# Altium PCB test_btb.PcbDoc
Units mm, origin at the board's own origin, x right, y up, seen from the top; angles counter-clockwise.
Board outline 30 x 29.97 mm, 2 copper layers (Top Layer, Bottom Layer); 8 components, 144 nets, 288 pads, 72 vias.
Unrouted connection lines stored in the file: 73.
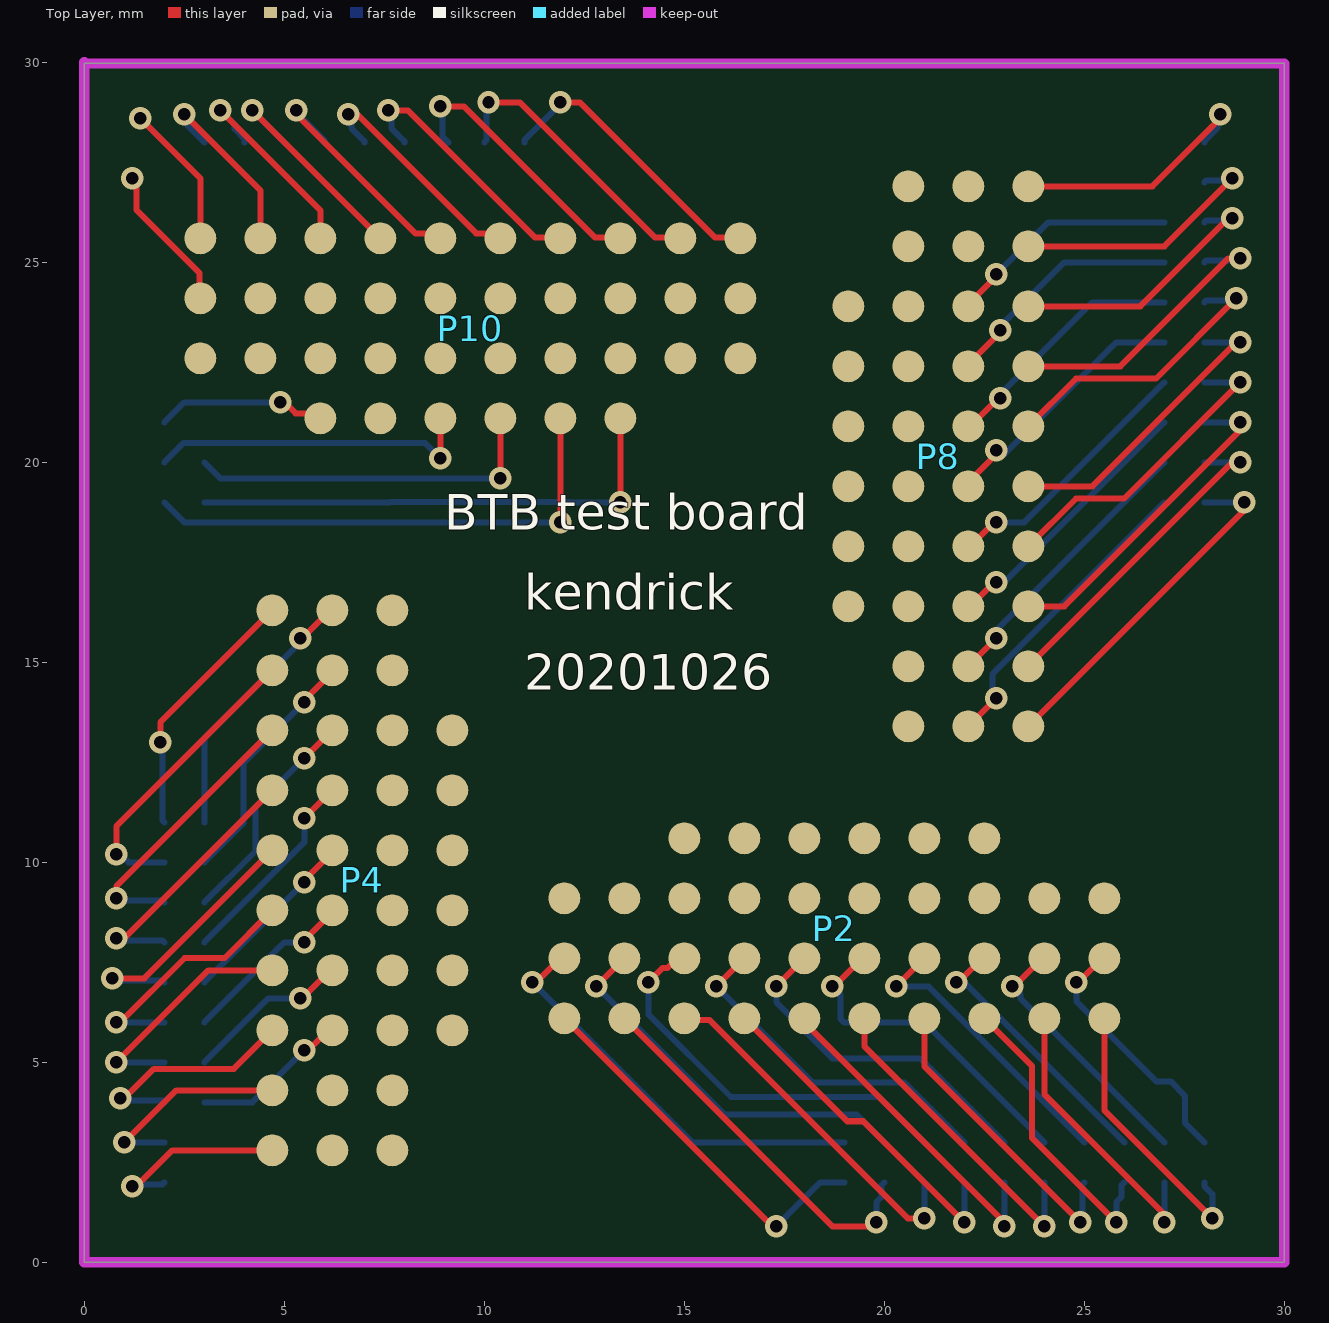
[diagram p0: Top Layer view]
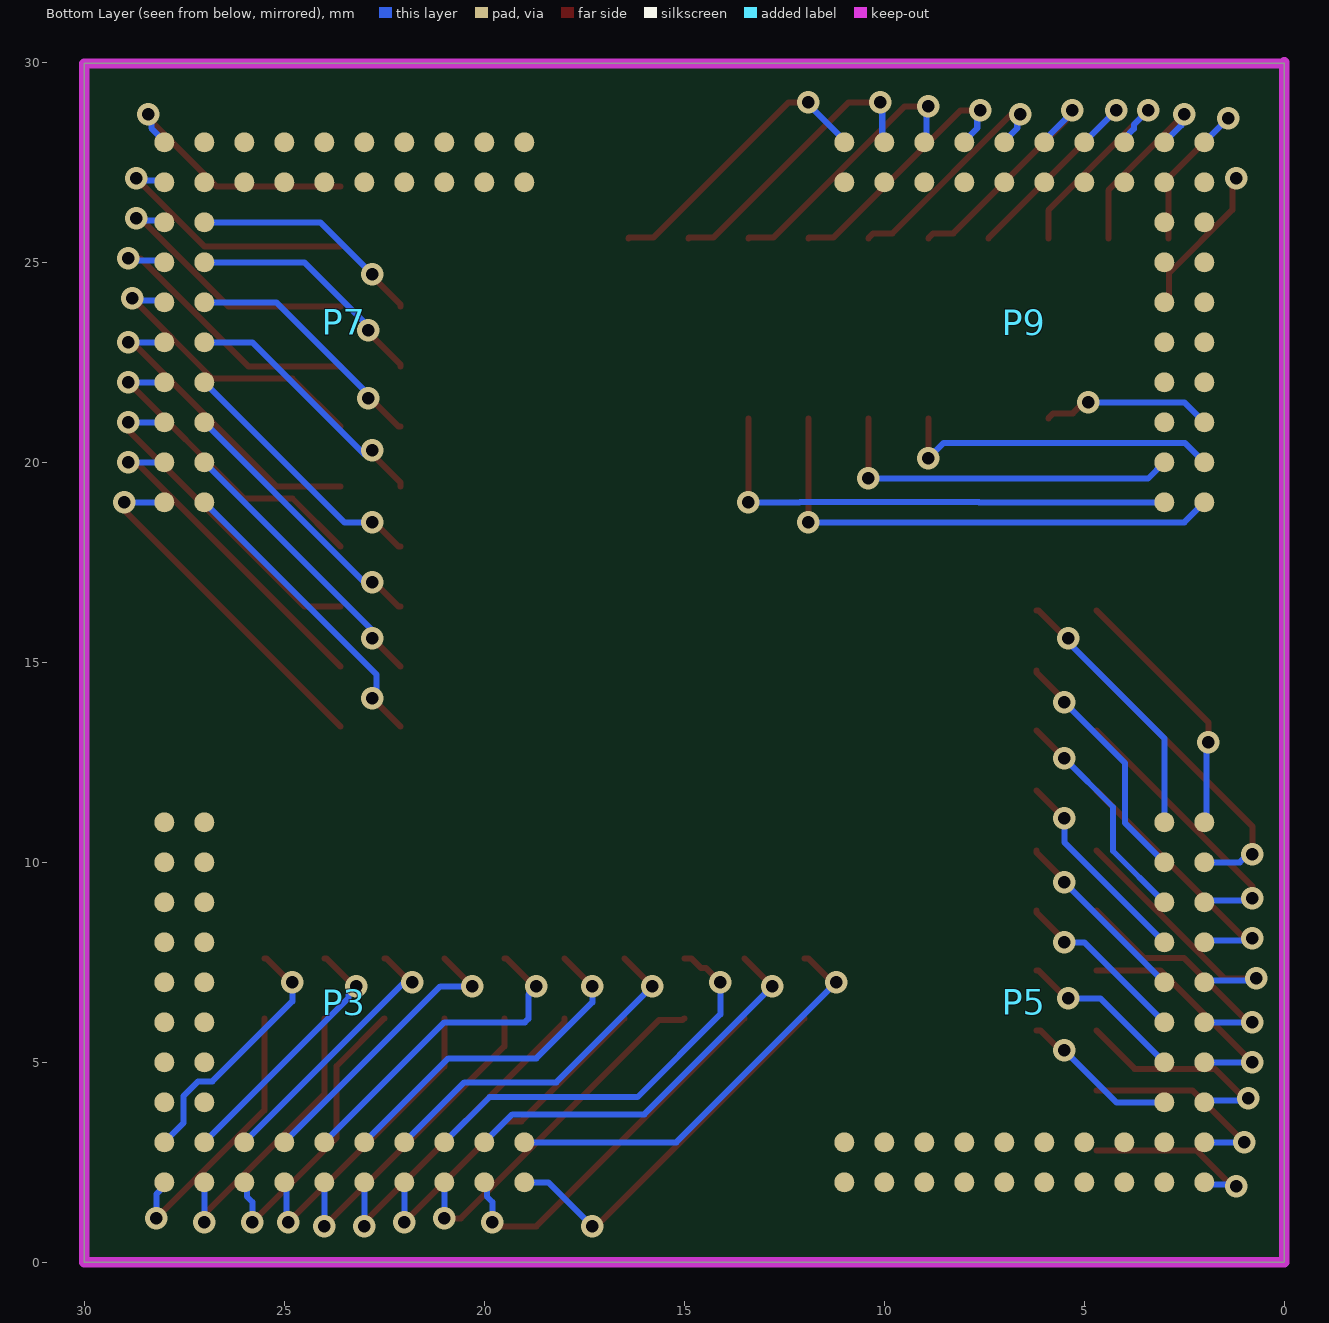
[diagram p1: Bottom Layer view, seen from below]

## Layer stack, top to bottom
Top Solder: solder mask 0.0102, Solder Resist, Dk 3.5
Top Layer: signal copper 0.0356
Dielectric 1: dielectric 0.32, FR-4, Dk 4.8
Bottom Layer: signal copper 0.0356
Bottom Solder: solder mask 0.0102, Solder Resist, Dk 3.5

## Board outline
0,0 0,29.972 30,29.972 30,0

## Design rules (kind name [scope] priority, off if disabled: settings)
Clearance POLY-VIA [IsVia vs InPoly] p1: gap=0.152 ignorepadtopadclearanceinfootprint=FALSE except(0: Arc-Hole Track-Hole SMDPad-Hole THPad-Hole Via-Hole Fill-Hole Poly-Hole Region-Hole Text-Hole)
Clearance POLY [InPoly] p2: gap=0.254 ignorepadtopadclearanceinfootprint=FALSE except(0: Arc-Hole Track-Hole SMDPad-Hole THPad-Hole Via-Hole Fill-Hole Poly-Hole Region-Hole Text-Hole)
Clearance [All] p3: gap=0.152 ignorepadtopadclearanceinfootprint=FALSE except(0: Arc-Hole Track-Hole SMDPad-Hole THPad-Hole Via-Hole Fill-Hole Poly-Hole Region-Hole Text-Hole)
ComponentClearance [All] p1 off: gap=0.254 collisioncheckmode=3 verticalgap=2540 showdistances=FALSE
HoleToHoleClearance [All] p1: gap=0.203 allowstackedmicrovias=TRUE
PolygonConnect [All] p1: connectstyle=Relief reliefconductorwidth=0.254 reliefentries=4 polygonreliefangle="90 Angle" airgapwidth=0.254
RoutingVias [All] p1: holewidth=0.33 width=0.66 viastyle="Through Hole" minholewidth=0.305 minwidth=0.559 maxholewidth=0.711 maxwidth=1.27
SolderMaskExpansion [All] p1: expansion=0.102 istentingtop=FALSE
Width Width_6 [InNetClass('SDRAM_ADDRESS')] p1: maxlimit=0.254 minlimit=0.152 preferedwidth=0.254 bottomlayer_prefwidth=0.203 minimp=50.000000 maximp=50.000000 favimp=50.000000
Width Width_5 [InNetClass('LCD')] p2: maxlimit=0.254 minlimit=0.152 preferedwidth=0.203 minimp=50.000000 maximp=50.000000 favimp=50.000000
Width Width_4 [InNetClass('FLASH_ADDRESS')] p3: maxlimit=0.254 minlimit=0.152 preferedwidth=0.203 minimp=50.000000 maximp=50.000000 favimp=50.000000
Width Width_3 [InNetClass('SDRAM_DATA')] p4: maxlimit=0.254 minlimit=0.152 preferedwidth=0.152 minimp=50.000000 maximp=50.000000 favimp=50.000000
Width Width_2 [InNet('VCC_3.3V')] p5: maxlimit=0.762 minlimit=0.152 preferedwidth=0.254 minimp=50.000000 maximp=50.000000 favimp=50.000000
Width Width_1 [InNet('VCC_5V')] p6: maxlimit=0.762 minlimit=0.203 preferedwidth=0.254 minimp=50.000000 maximp=50.000000 favimp=50.000000
Width [All] p7: maxlimit=0.762 minlimit=0.152 preferedwidth=0.254 minimp=50.000000 maximp=50.000000 favimp=50.000000
28 further rules are at their usual default settings.

## Components (designator, comment, footprint, x,y, rotation, side; value= is the part's Value field where it differs from the comment)
P2 "TEST_BTB_T" TEST_BTB_T 25.5,6.1 r180 top locked
P3 "TEST_BTB_B" TEST_BTB_B 28,2 r180 top locked
P4 "TEST_BTB_T" TEST_BTB_T 4.7,2.8 r90 top locked
P5 "TEST_BTB_B" TEST_BTB_B 2,2 r90 top locked
P7 "TEST_BTB_B" TEST_BTB_B 28,28 r270 top locked
P8 "TEST_BTB_T" TEST_BTB_T 23.6,26.9 r270 top locked
P9 "TEST_BTB_B" TEST_BTB_B 2,28 r0 top locked
P10 "TEST_BTB_T" TEST_BTB_T 2.9,25.6 r0 top locked

## Footprints (in the part's own frame and the unit in brackets; to place one, negate y for a bottom-side part, rotate by r counter-clockwise, add the part's x,y. Pads: shape width x height; smd on the part's side, far side on the other; paste and mask are expansions set on the pad)
TEST_BTB_B [mm] "测试板级之间的焊盘连接"
  round 0.5 smd far side: 1(0,0) 2(1,0) 3(2,0) 4(3,0) 5(4,0) 6(5,0) 7(6,0) 8(7,0) 9(8,0) 10(9,0) 11(0,-1) 12(1,-1) 13(2,-1) 14(3,-1) 15(4,-1) 16(5,-1) 17(6,-1) 18(7,-1) 19(8,-1) 20(9,-1) 21(0,-2) 22(1,-2) 23(0,-3) 24(1,-3) 25(0,-4) 26(1,-4) 27(0,-5) 28(1,-5) 29(0,-6) 30(1,-6) 31(0,-7) 32(1,-7) 33(0,-8) 34(1,-8) 35(0,-9) 36(1,-9)
TEST_BTB_T [mm] "测试板级之间的焊盘连接"
  round 0.8 smd: 1(0,0) 2(1.5,0) 3(3,0) 4(4.5,0) 5(6,0) 6(7.5,0) 7(9,0) 8(10.5,0) 9(12,0) 10(13.5,0) 11(0,-1.5) 12(1.5,-1.5) 13(3,-1.5) 14(4.5,-1.5) 15(6,-1.5) 16(7.5,-1.5) 17(9,-1.5) 18(10.5,-1.5) 19(12,-1.5) 20(13.5,-1.5) 21(0,-3) 22(1.5,-3) 23(3,-3) 24(4.5,-3) 25(6,-3) 26(7.5,-3) 27(9,-3) 28(10.5,-3) 29(12,-3) 30(13.5,-3) 31(3,-4.5) 32(4.5,-4.5) 33(6,-4.5) 34(7.5,-4.5) 35(9,-4.5) 36(10.5,-4.5)

## Via types
v1: diameter 0.559/0.559 (per signal layer), hole 0.305, Top Layer to Bottom Layer, tented both sides, 72 vias

## Nets (pads, with @x,y where several pads share a name; then routed paths per layer and width w, separated by ;. In a path a pad name is that pad's centre, name@x,y a point inside that pad or via, vN(x,y) a via of type N, cw(c..) or ccw(c..) an arc to the next point about the centre after c; other vN are vias at no path point)
NetP2_1: P2.1 P3.1 | length 7.1
  Top Layer w0.152: P2.1 25.5,3.8 v1(28.2,1.1)
  Bottom Layer w0.152: P3.1 28,1.906 28.2,1.706 v1(28.2,1.1)
NetP2_2: P2.2 P3.2 | length 7.3
  Top Layer w0.152: P2.2 24,4.2 27,1.2 v1(27,1)
  Bottom Layer w0.152: v1(27,1) P3.2
NetP2_3: P2.3 P3.3 | length 7.5
  Top Layer w0.152: P2.3 23.695,4.905 23.695,3.105 v1(25.8,1)
  Bottom Layer w0.152: v1(25.8,1) 25.8,1.508 25.933,1.641 25.933,1.933 P3.3
NetP2_4: P2.4 P3.4 | length 7.8
  Top Layer w0.152: P2.4 21,4.9 v1(24.9,1)
  Bottom Layer w0.152: v1(24.9,1) 24.95,1.05 24.95,1.95 P3.4
NetP2_5: P2.5 P3.5 | length 8.2
  Top Layer w0.152: P2.5 19.5,5.4 v1(24,0.9)
  Bottom Layer w0.152: v1(24,0.9) P3.5
NetP2_6: P2.6 P3.6 | length 8.4
  Top Layer w0.152: P2.6 18,6 23,1 v1(23,0.9)
  Bottom Layer w0.152: v1(23,0.9) P3.6
NetP2_7: P2.7 P3.7 | length 8.6
  Top Layer w0.152: P2.7 19.073,3.527 19.473,3.527 v1(22,1)
  Bottom Layer w0.152: v1(22,1) P3.7
NetP2_8: P2.8 P3.8 | length 9
  Top Layer w0.152: P2.8 15.041,6.059 15.629,6.059 20.588,1.1 v1(21,1.1)
  Bottom Layer w0.152: v1(21,1.1) P3.8
NetP2_9: P2.9 P3.9 | length 9.6
  Top Layer w0.152: P2.9 18.7,0.9 19.711,0.9 19.8,0.989 v1(19.8,1)
  Bottom Layer w0.152: v1(19.8,1) 19.8,1.508 19.934,1.642 19.934,1.933 P3.9
NetP2_10: P2.10 P3.10 | length 9.6
  Top Layer w0.152: P2.10 17.2,0.9 v1(17.3,0.9)
  Bottom Layer w0.152: v1(17.3,0.9) 18.4,2 P3.10
NetP2_11: P2.11 P3.11 | length 6.5
  Top Layer w0.152: v1(24.8,7) 24.85,7 25.45,7.6 P2.11
  Bottom Layer w0.152: v1(24.8,7) 24.8,6.523 26.802,4.521 27.155,4.521 27.521,4.155 27.521,3.479 P3.11
NetP2_12: P2.12 P3.12 | length 6.6
  Top Layer w0.152: v1(23.2,6.9) 23.25,6.9 23.95,7.6 P2.12
  Bottom Layer w0.152: v1(23.2,6.9) 23.4,6.7 23.4,6.6 P3.12
NetP2_13: P2.13 P3.13 | length 6.8
  Top Layer w0.152: v1(21.8,7) 21.85,7 22.45,7.6 P2.13
  Bottom Layer w0.152: v1(21.8,7) 22,7 P3.13
NetP2_14: P2.14 P3.14 | length 7.3
  Top Layer w0.152: v1(20.3,6.9) P2.14
  Bottom Layer w0.152: v1(20.3,6.9) 21.1,6.9 P3.14
NetP2_15: P2.15 P3.15 | length 8.4
  Top Layer w0.152: v1(18.7,6.9) 18.75,6.9 19.45,7.6 P2.15
  Bottom Layer w0.152: v1(18.7,6.9) 18.9,6.7 18.9,6.089 18.989,6 21,6 P3.15
NetP2_16: P2.16 P3.16 | length 8.5
  Top Layer w0.152: v1(17.3,6.9) P2.16
  Bottom Layer w0.152: v1(17.3,6.9) 17.3,6.5 18.7,5.1 20.9,5.1 P3.16
NetP2_17: P2.17 P3.17 | length 8.8
  Top Layer w0.152: v1(15.8,6.9) P2.17
  Bottom Layer w0.152: v1(15.8,6.9) 15.9,6.8 18.2,4.5 20.5,4.5 P3.17
NetP2_18: P2.18 P3.18 | length 10.2
  Top Layer w0.152: v1(14.1,7) 14.459,7.359 14.584,7.359 14.825,7.6 P2.18
  Bottom Layer w0.152: v1(14.1,7) 14.1,6.2 16.167,4.133 19.867,4.133 P3.18
NetP2_19: P2.19 P3.19 | length 9.8
  Top Layer w0.152: v1(12.8,6.9) P2.19
  Bottom Layer w0.152: v1(12.8,6.9) 16,3.7 19.3,3.7 P3.19
NetP2_20: P2.20 P3.20 | length 10.5
  Top Layer w0.152: v1(11.2,7) 11.3,7 11.9,7.6 P2.20
  Bottom Layer w0.152: v1(11.2,7) 15.2,3 P3.20
NetP2_21: P2.21 P3.21
NetP2_22: P2.22 P3.22
NetP2_23: P2.23 P3.23
NetP2_24: P2.24 P3.24
NetP2_25: P2.25 P3.25
NetP2_26: P2.26 P3.26
NetP2_27: P2.27 P3.27
NetP2_28: P2.28 P3.28
NetP2_29: P2.29 P3.29
NetP2_30: P2.30 P3.30
NetP2_31: P2.31 P3.31
NetP2_32: P2.32 P3.32
NetP2_33: P2.33 P3.33
NetP2_34: P2.34 P3.34
NetP2_35: P2.35 P3.35
NetP2_36: P2.36 P3.36
NetP4_1: P4.1 P5.1 | length 4.7
  Top Layer w0.152: v1(1.2,1.9) 1.3,1.9 2.2,2.8 P4.1
  Bottom Layer w0.152: v1(1.2,1.9) 1.25,1.95 1.95,1.95 P5.1
NetP4_2: P4.2 P5.2 | length 5.2
  Top Layer w0.152: v1(1,3) 2.3,4.3 P4.2
  Bottom Layer w0.152: v1(1,3) P5.2
NetP4_3: P4.3 P5.3 | length 5.6
  Top Layer w0.152: v1(0.9,4.1) 1,4.1 1.738,4.838 3.738,4.838 P4.3
  Bottom Layer w0.152: v1(0.9,4.1) 0.95,4.05 1.95,4.05 P5.3
NetP4_4: P4.4 P5.4 | length 6.1
  Top Layer w0.152: v1(0.8,5) 3.1,7.3 P4.4
  Bottom Layer w0.152: v1(0.8,5) P5.4@2,5
NetP4_5: P4.5 P5.5 | length 6.3
  Top Layer w0.152: v1(0.8,6) 0.9,6 2.505,7.605 3.505,7.605 P4.5
  Bottom Layer w0.152: v1(0.8,6) P5.5
NetP4_6: P4.6 P5.6 | length 6.7
  Top Layer w0.152: v1(0.7,7.1) 1.5,7.1 P4.6
  Bottom Layer w0.152: v1(0.7,7.1) 0.75,7.05 1.95,7.05 P5.6
NetP4_7: P4.7 P5.7 | length 6.7
  Top Layer w0.152: v1(0.8,8.1) 0.837,8.063 0.963,8.063 P4.7
  Bottom Layer w0.152: v1(0.8,8.1) 0.85,8.05 1.95,8.05 P5.7
NetP4_8: P4.8 P5.8 | length 7.1
  Top Layer w0.152: v1(0.8,9.1) 0.8,9.4 P4.8
  Bottom Layer w0.152: v1(0.8,9.1) 0.85,9.05 1.95,9.05 P5.8
NetP4_9: P4.9 P5.9 | length 7.5
  Top Layer w0.152: v1(0.8,10.2) 0.8,10.9 P4.9
  Bottom Layer w0.152: v1(0.8,10.2) 0.91,10.2 1.11,10 P5.9
NetP4_10: P4.10 P5.10 | length 6.5
  Top Layer w0.152: v1(1.9,13) 1.9,13.5 P4.10
  Bottom Layer w0.152: v1(1.9,13) 1.95,12.95 1.95,11.05 P5.10
NetP4_11: P4.11 P5.11
NetP4_12: P4.12 P5.12
NetP4_13: P4.13 P5.13 | length 3.9
  Top Layer w0.152: v1(5.5,5.3) 5.6,5.3 6.1,5.8 P4.13
  Bottom Layer w0.152: P5.13 4.2,4 v1(5.5,5.3)
NetP4_14: P4.14 P5.14 | length 4.2
  Top Layer w0.152: v1(5.4,6.6) 5.45,6.6 6.15,7.3 P4.14
  Bottom Layer w0.152: P5.14 4.6,6.6 v1(5.4,6.6)
NetP4_15: P4.15 P5.15 | length 4.4
  Top Layer w0.152: v1(5.5,8) 5.5,8.05 6.2,8.75 P4.15
  Bottom Layer w0.152: P5.15 5,8 v1(5.5,8)
NetP4_16: P4.16 P5.16 | length 4.6
  Top Layer w0.152: v1(5.5,9.5) 5.5,9.55 6.2,10.25 P4.16
  Bottom Layer w0.152: P5.16 5.4,9.4 5.411,9.4 5.5,9.489 v1(5.5,9.5)
NetP4_17: P4.17 P5.17 | length 5.1
  Top Layer w0.152: v1(5.5,11.1) P4.17
  Bottom Layer w0.152: P5.17 5.5,10.5 v1(5.5,11.1)
NetP4_18: P4.18 P5.18 | length 5.6
  Top Layer w0.152: v1(5.5,12.6) P4.18
  Bottom Layer w0.152: P5.18 4.283,10.283 4.283,11.383 v1(5.5,12.6)
NetP4_19: P4.19 P5.19 | length 6.1
  Top Layer w0.152: v1(5.5,14) 5.5,14.05 6.2,14.75 P4.19
  Bottom Layer w0.152: P5.19 3.978,10.978 3.978,12.478 v1(5.5,14)
NetP4_20: P4.20 P5.20 | length 6.7
  Top Layer w0.152: v1(5.4,15.6) 5.45,15.6 6.15,16.3 P4.20
  Bottom Layer w0.152: P5.20 3,13.1 5.4,15.5 v1(5.4,15.6)
NetP4_21: P4.21 P5.21
NetP4_22: P4.22 P5.22
NetP4_23: P4.23 P5.23
NetP4_24: P4.24 P5.24
NetP4_25: P4.25 P5.25
NetP4_26: P4.26 P5.26
NetP4_27: P4.27 P5.27
NetP4_28: P4.28 P5.28
NetP4_29: P4.29 P5.29
NetP4_30: P4.30 P5.30
NetP4_31: P4.31 P5.31
NetP4_32: P4.32 P5.32
NetP4_33: P4.33 P5.33
NetP4_34: P4.34 P5.34
NetP4_35: P4.35 P5.35
NetP4_36: P4.36 P5.36
NetP7_1: P7.1 P8.1 | length 6.5
  Top Layer w0.152: P8.1 26.7,26.9 28.4,28.6 v1(28.4,28.7)
  Bottom Layer w0.152: P7.1 28,28.032 28.322,28.355 28.322,28.622 v1(28.4,28.7)
NetP7_2: P7.2 P8.2 | length 6.5
  Top Layer w0.152: P8.2 27,25.4 v1(28.7,27.1)
  Bottom Layer w0.152: P7.2 28.05,27.05 28.65,27.05 v1(28.7,27.1)
NetP7_3: P7.3 P8.3 | length 6.8
  Top Layer w0.152: P8.3 26.4,23.9 28.6,26.1 v1(28.7,26.1)
  Bottom Layer w0.152: P7.3 28.05,26.05 28.65,26.05 v1(28.7,26.1)
NetP7_4: P7.4 P8.4 | length 7.4
  Top Layer w0.152: P8.4 25.9,22.4 28.6,25.1 v1(28.9,25.1)
  Bottom Layer w0.152: P7.4 28.05,25.05 28.85,25.05 v1(28.9,25.1)
NetP7_5: P7.5 P8.5 | length 7.4
  Top Layer w0.152: P8.5 24.795,22.095 26.795,22.095 v1(28.8,24.1)
  Bottom Layer w0.152: P7.5 28.05,24.05 28.75,24.05 v1(28.8,24.1)
NetP7_6: P7.6 P8.6 | length 7.7
  Top Layer w0.152: P8.6 25.2,19.4 28.8,23 v1(28.9,23)
  Bottom Layer w0.152: P7.6 v1(28.9,23)
NetP7_7: P7.7 P8.7 | length 7.9
  Top Layer w0.152: P8.7 24.795,19.095 25.995,19.095 v1(28.9,22)
  Bottom Layer w0.152: P7.7 v1(28.9,22)
NetP7_8: P7.8 P8.8 | length 8.3
  Top Layer w0.152: P8.8 24.5,16.4 28.937,20.837 28.937,20.963 v1(28.9,21)
  Bottom Layer w0.152: P7.8 v1(28.9,21)
NetP7_9: P7.9 P8.9 | length 8.3
  Top Layer w0.152: P8.9 28.7,20 v1(28.9,20)
  Bottom Layer w0.152: P7.9 v1(28.9,20)
NetP7_10: P7.10 P8.10 | length 8.8
  Top Layer w0.152: P8.10 29,18.8 v1(29,19)
  Bottom Layer w0.152: P7.10 v1(29,19)
NetP7_11: P7.11 P8.11
NetP7_12: P7.12 P8.12
NetP7_13: P7.13 P8.13 | length 5.8
  Top Layer w0.152: P8.13 22.1,23.95 22.8,24.65 v1(22.8,24.7)
  Bottom Layer w0.152: v1(22.8,24.7) 24.1,26 P7.13
NetP7_14: P7.14 P8.14 | length 6.1
  Top Layer w0.152: P8.14 22.1,22.45 22.9,23.25 v1(22.9,23.3)
  Bottom Layer w0.152: v1(22.9,23.3) 22.9,23.4 24.5,25 P7.14
NetP7_15: P7.15 P8.15 | length 6.2
  Top Layer w0.152: P8.15 22.15,20.9 22.85,21.6 v1(22.9,21.6)
  Bottom Layer w0.152: v1(22.9,21.6) 22.9,21.7 25.2,24 P7.15
NetP7_16: P7.16 P8.16 | length 6.6
  Top Layer w0.152: P8.16 22.1,19.5 22.8,20.2 v1(22.8,20.3)
  Bottom Layer w0.152: v1(22.8,20.3) 22.878,20.222 23.004,20.222 23.013,20.213 25.8,23 P7.16
NetP7_17: P7.17 P8.17 | length 6.6
  Top Layer w0.152: P8.17 22.15,17.9 22.75,18.5 v1(22.8,18.5)
  Bottom Layer w0.152: v1(22.8,18.5) 23.5,18.5 P7.17
NetP7_18: P7.18 P8.18 | length 6.8
  Top Layer w0.152: P8.18 22.15,16.4 22.75,17 v1(22.8,17)
  Bottom Layer w0.152: v1(22.8,17) 23,17 P7.18
NetP7_19: P7.19 P8.19 | length 7.1
  Top Layer w0.152: P8.19 v1(22.8,15.6)
  Bottom Layer w0.152: v1(22.8,15.6) 22.8,15.8 P7.19
NetP7_20: P7.20 P8.20 | length 7.7
  Top Layer w0.152: P8.20 v1(22.8,14.1)
  Bottom Layer w0.152: v1(22.8,14.1) 22.789,14.1 22.7,14.189 22.7,14.7 P7.20
NetP7_21: P7.21 P8.21
NetP7_22: P7.22 P8.22
NetP7_23: P7.23 P8.23
NetP7_24: P7.24 P8.24
NetP7_25: P7.25 P8.25
NetP7_26: P7.26 P8.26
NetP7_27: P7.27 P8.27
NetP7_28: P7.28 P8.28
NetP7_29: P7.29 P8.29
NetP7_30: P7.30 P8.30
NetP7_31: P7.31 P8.31
NetP7_32: P7.32 P8.32
NetP7_33: P7.33 P8.33
NetP7_34: P7.34 P8.34
NetP7_35: P7.35 P8.35
NetP7_36: P7.36 P8.36
NetP9_1: P9.1 P10.1 | length 4.5
  Top Layer w0.152: v1(1.4,28.6) 2.9,27.1 P10.1
  Bottom Layer w0.152: v1(1.4,28.6) P9.1
NetP9_2: P9.2 P10.2 | length 4.8
  Top Layer w0.152: v1(2.5,28.7) 4.4,26.8 P10.2
  Bottom Layer w0.152: v1(2.5,28.7) 2.578,28.622 2.578,28.422 P9.2
NetP9_3: P9.3 P10.3 | length 5.3
  Top Layer w0.152: v1(3.4,28.8) 5.9,26.3 P10.3
  Bottom Layer w0.152: v1(3.4,28.8) 3.759,28.441 3.759,28.335 4,28.094 P9.3
NetP9_4: P9.4 P10.4 | length 5.7
  Top Layer w0.152: v1(4.2,28.8) P10.4
  Bottom Layer w0.152: v1(4.2,28.8) P9.4
NetP9_5: P9.5 P10.5 | length 6.1
  Top Layer w0.152: v1(5.3,28.8) 5.3,28.7 8.276,25.724 8.776,25.724 P10.5
  Bottom Layer w0.152: v1(5.3,28.8) 5.3,28.75 6,28.05 P9.5
NetP9_6: P9.6 P10.6 | length 6
  Top Layer w0.152: v1(6.6,28.7) 6.647,28.747 6.773,28.747 9.796,25.724 10.276,25.724 P10.6
  Bottom Layer w0.152: v1(6.6,28.7) 6.678,28.622 6.678,28.355 7,28.032 P9.6
NetP9_7: P9.7 P10.7 | length 6.6
  Top Layer w0.152: v1(7.6,28.8) 8.089,28.8 11.271,25.618 11.882,25.618 P10.7
  Bottom Layer w0.152: v1(7.6,28.8) 7.678,28.722 7.678,28.355 8,28.032 P9.7
NetP9_8: P9.8 P10.8 | length 6.9
  Top Layer w0.152: v1(8.9,28.9) 9.489,28.9 12.771,25.618 13.382,25.618 P10.8
  Bottom Layer w0.152: v1(8.9,28.9) 8.95,28.85 8.95,28.15 9.1,28 P9.8
NetP9_9: P9.9 P10.9 | length 7.3
  Top Layer w0.152: v1(10.104,29.004) 10.107,29 10.889,29 14.271,25.618 14.882,25.618 P10.9
  Bottom Layer w0.152: P9.9 10.052,28.052 10.052,28.952 v1(10.104,29.004)
NetP9_10: P9.10 P10.10 | length 7.3
  Top Layer w0.152: v1(11.9,29) 12.389,29 15.771,25.618 16.382,25.618 P10.10
  Bottom Layer w0.152: P9.10 11,28.05 11.9,28.95 v1(11.9,29)
NetP9_11: P9.11 P10.11 | length 3.7
  Top Layer w0.152: v1(1.2,27.1) 1.211,27.1 1.3,27.011 1.3,26.311 2.882,24.729 2.882,24.118 P10.11
NetP9_12: P9.12 P10.12
NetP9_13: P9.13 P10.13
NetP9_14: P9.14 P10.14
NetP9_15: P9.15 P10.15
NetP9_16: P9.16 P10.16
NetP9_17: P9.17 P10.17
NetP9_18: P9.18 P10.18
NetP9_19: P9.19 P10.19
NetP9_20: P9.20 P10.20
NetP9_21: P9.21 P10.21
NetP9_22: P9.22 P10.22
NetP9_23: P9.23 P10.23
NetP9_24: P9.24 P10.24
NetP9_25: P9.25 P10.25
NetP9_26: P9.26 P10.26
NetP9_27: P9.27 P10.27
NetP9_28: P9.28 P10.28
NetP9_29: P9.29 P10.29
NetP9_30: P9.30 P10.30
NetP9_31: P9.31 P10.31 | length 4.3
  Top Layer w0.152: v1(4.9,21.5) 5.01,21.5 5.286,21.224 5.776,21.224 P10.31
  Bottom Layer w0.152: P9.31 2.5,21.5 v1(4.9,21.5)
NetP9_32: P9.32 P10.32
NetP9_33: P9.33 P10.33 | length 8.3
  Top Layer w0.152: v1(8.9,20.1) P10.33
  Bottom Layer w0.152: P9.33 2.479,20.479 8.521,20.479 v1(8.9,20.1)
NetP9_34: P9.34 P10.34 | length 9.1
  Top Layer w0.152: v1(10.4,19.6) P10.34
  Bottom Layer w0.152: P9.34 3.408,19.592 10.392,19.592 v1(10.4,19.6)
NetP9_35: P9.35 P10.35 | length 12.7
  Top Layer w0.152: v1(11.9,18.5) P10.35
  Bottom Layer w0.152: P9.35 2.5,18.5 v1(11.9,18.5)
NetP9_36: P9.36 P10.36 | length 12.5
  Top Layer w0.152: v1(13.4,19) P10.36
  Bottom Layer w0.152: P9.36 7.631,19 7.639,19.008 12.11,19.008 12.118,19 v1(13.4,19)

## Keep-outs
Keep-Out Layer:
  lines w0.254: 0,29.972 30,29.972 30,0 0,0 0,30

## Silkscreen, mask and mechanical layers (free items; w line width, h text height)
Top Overlay:
  text "BTB test board" at 9,18.015 h1.52
  text "kendrick" at 11,16.015 h1.52
  text "20201026" at 10.999,14.016 h1.52